# Altium PCB NBP-28 Rev 1.00.PCBDOC (part 4 of 6)
Units mil, origin at the board's own origin, x right, y up, seen from the top; angles counter-clockwise.
Board outline 2716.54 x 3917.15 mil, 8 copper layers (Top Layer, MidLayer3, MidLayer1, VCC, Gnd, VCCINT, MidLayer2, Bottom Layer), stack 59.043 mil thick; 229 components, 429 nets, 1584 pads, 1020 vias.
Unrouted connection lines stored in the file: 302.
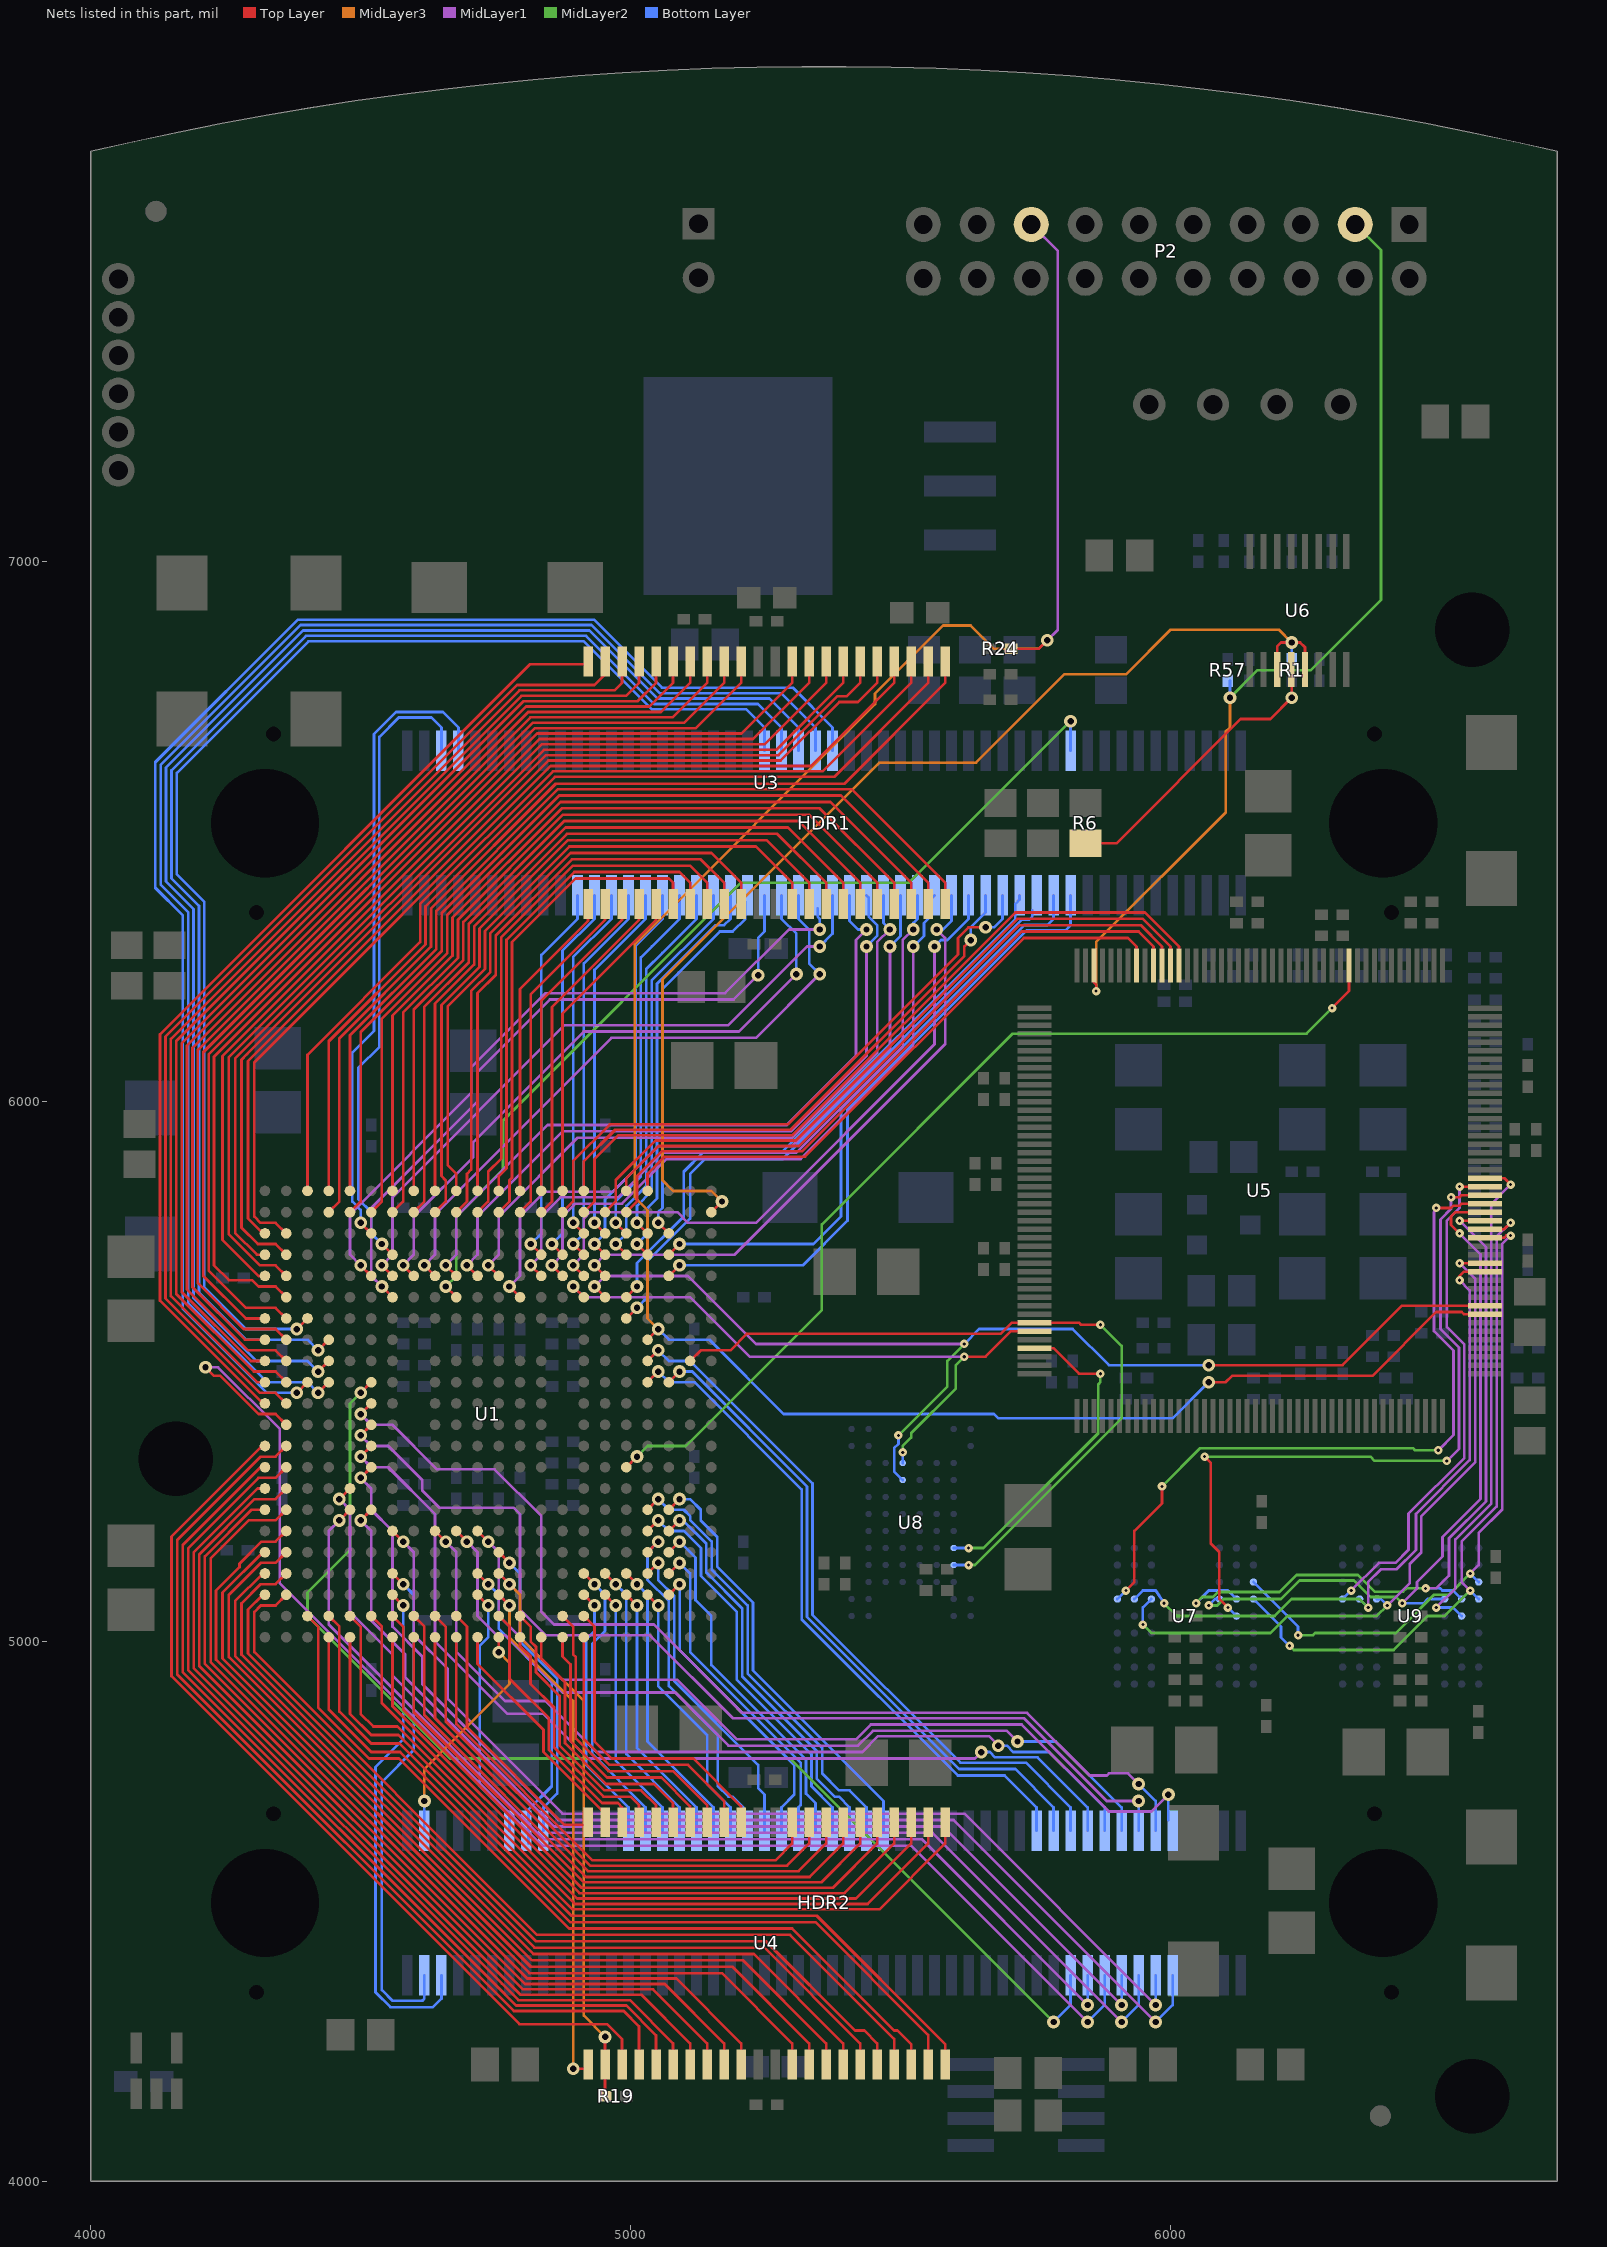
[diagram p10: the nets of this part, all layers, seen from the top]

## Via types
v1: diameter 23.62, hole 11.81, Top Layer to Bottom Layer, 614 vias
v2: diameter 15.75, hole 5.91, Top Layer to Bottom Layer, 214 vias
v3: diameter 78.74, hole 47.24, Top Layer to Bottom Layer, 101 vias
v4: diameter 35.43, hole 19.68, Top Layer to Bottom Layer, 59 vias
v5: diameter 19.68, hole 7.87, Top Layer to Bottom Layer, 32 vias

## Nets (pads, with @x,y where several pads share a name; then routed paths per layer and width w, separated by ;. In a path a pad name is that pad's centre, name@x,y a point inside that pad or via, vN(x,y) a via of type N, cw(c..) or ccw(c..) an arc to the next point about the centre after c; other vN are vias at no path point) (continued)
NEXUS_TMS: HDR1.80 U1.F10 | length 1791.8
  Top Layer w5: v1(4657.48,5657.48) U1.F10@4677.17,5637.8
  MidLayer2 w5: v1(4657.48,5657.48) 4677.17,5677.17 4677.17,5787.4 4763.78,5874.02 4763.78,5964.57 5204.73,6405.51 5515.75,6405.51 v1(5814.96,6704.72)
  Bottom Layer w5: HDR1.80@5814.96,6649.61 v1(5814.96,6704.72)
NFLASH_CS: U5.41 U8.H2 | length 609.3
  Top Layer w5: U5.41@5748.03,5543.31 5783.47,5543.31 5830.71,5496.06 v2(5870.08,5496.06)
  MidLayer2 w5: v2(5625.99,5173.23) 5653.54,5173.23 5866.14,5385.83 5866.14,5476.38 5870.08,5480.32 v2(5870.08,5496.06)
  Bottom Layer w5: U8.H2@5598.43,5173.23 v2(5625.99,5173.23)
NOE: U1.J21 U5.38 U8.J2 | length 1403.9
  Top Layer w5: U1.J21@5110.24,5519.69 5129.92,5539.37 5185.04,5539.37 5215.91,5570.24 5685.86,5570.24 5706.18,5590.55 U5.38@5748.03,5590.55 5830.71,5590.55 5834.65,5586.61 v2(5870.08,5586.61)
  MidLayer2 w5: v2(5625.99,5141.73) 5637.8,5141.73 5909.45,5413.39 5909.45,5547.24 v2(5870.08,5586.61)
  Bottom Layer w5: U8.J2@5598.43,5141.73 v2(5625.99,5141.73)
NRESETIN: P2.15 R24.1 U1.H19 U5.96 | length 4358.4
  Top Layer w5: U1.H19@5031.5,5559.06 v1(5051.18,5578.74) ; R24.1@5704.73,6838.58 5755.91,6838.58 v1(5771.65,6854.33) ; v1(6070.87,5480.32) 6102.36,5480.32 6114.17,5492.13 6374.02,5492.13 6492.13,5610.24 6539.37,5610.24 6543.31,5606.3 U5.96@6582.68,5606.3
  MidLayer1 w5: P2.15@5742.13,7624.8 5791.34,7575.59 5791.34,6874.02 v1(5771.65,6854.33)
  MidLayer3 w5: v1(5051.18,5578.74) 5031.5,5598.43 5031.5,5799.21 5007.88,5822.84 5007.88,6291.34 5452.76,6736.22 5452.76,6755.91 5578.74,6881.89 5629.92,6881.89 5673.23,6838.58 5755.91,6838.58 v1(5771.65,6854.33)
  Bottom Layer w5: v1(5051.18,5578.74) 5070.87,5559.06 5145.67,5559.06 5283.47,5421.26 5673.23,5421.26 5681.1,5413.39 6003.94,5413.39 v1(6070.87,5480.32)
NRESETOUT: U1.F17 U5.97 U8.D5 | length 2134.9
  Top Layer w5: v1(4933.07,5657.48) U1.F17@4952.76,5637.8 ; v1(6070.87,5511.81) 6318.9,5511.81 6429.14,5622.05 U5.97@6582.68,5622.05
  MidLayer1 w5: v1(4933.07,5657.48) 4952.76,5677.17 5106.3,5677.17 5232.28,5551.18 v2(5618.11,5551.18)
  MidLayer2 w5: v2(5496.06,5381.89) 5586.62,5472.44 5586.62,5519.69 v2(5618.11,5551.18)
  Bottom Layer w5: v2(5496.06,5381.89) 5496.06,5366.14 5488.19,5358.27 5488.19,5314.96 U8.D5@5503.94,5299.21 ; v2(5618.11,5551.18) 5645.67,5578.74 5818.9,5578.74 5885.83,5511.81 v1(6070.87,5511.81)
NSDRAM_CAS: U5.108 U7.F7 U9.F7 | length 1367
  Top Layer w5: v2(6535.43,5755.91) 6519.69,5771.65 6519.69,5787.4 6527.56,5795.28 U5.108@6582.68,5795.28
  MidLayer1 w5: v2(6429.14,5070.87) 6456.69,5098.43 6456.69,5110.24 6503.94,5157.48 6503.94,5193.64 6574.17,5263.88 6574.17,5717.17 v2(6535.43,5755.91)
  MidLayer2 w5: v2(6070.87,5066.93) 6086.62,5066.93 6098.43,5078.74 6204.73,5078.74 6239.21,5113.23 6339.53,5113.23 6370.4,5082.36 6417.64,5082.36 v2(6429.14,5070.87)
  Bottom Layer w5: v2(6070.87,5066.93) 6082.68,5078.74 U7.F7@6090.55,5078.74 ; v2(6429.14,5070.87) 6468.51,5070.87 6476.38,5078.74 U9.F7@6507.88,5078.74
NSDRAM_CS: U5.105 U7.G9 U9.G9 | length 1227
  Top Layer w5: U5.105@6582.68,5748.03 6618.11,5748.03 6622.05,5751.97 v2(6629.92,5751.97)
  MidLayer1 w5: v2(6555.12,5125.98) 6570.87,5141.73 6570.87,5200.79 6614.17,5244.1 6614.17,5736.22 v2(6629.92,5751.97)
  MidLayer2 w5: v2(6236.22,5011.81) 6263.78,5011.81 6267.72,5015.75 6417.32,5015.75 6488.19,5086.61 6515.75,5086.61 v2(6555.12,5125.98)
  Bottom Layer w5: U7.G9@6153.54,5110.24 6236.22,5027.56 v2(6236.22,5011.81) ; v2(6555.12,5125.98) U9.G9@6570.87,5110.24
NSDRAM_RAS: U5.107 U7.F8 U9.F8 | length 1434.7
  Top Layer w5: v2(6535.43,5779.53) U5.107@6582.68,5779.53
  MidLayer1 w5: v2(6472.44,5098.43) 6492.13,5098.43 6515.75,5122.05 6515.75,5191.31 6584.17,5259.73 6584.17,5730.79 v2(6535.43,5779.53)
  MidLayer2 w5: v2(6047.25,5070.87) 6058.74,5082.36 6078.43,5082.36 6087.8,5091.73 6201.97,5091.73 6233.47,5123.23 6347.19,5123.23 6378.06,5092.36 6430.95,5092.36 6437.01,5098.43 v2(6472.44,5098.43)
  Bottom Layer w5: v2(6047.25,5070.87) 6070.87,5094.49 6106.3,5094.49 U7.F8@6122.05,5078.74 ; v2(6472.44,5098.43) 6499.66,5098.43 6503.59,5094.49 6523.62,5094.49 U9.F8@6539.37,5078.74
NSDRAM_WE: U5.106 U7.F9 U9.F9 | length 1297.4
  Top Layer w5: U5.106@6582.68,5763.78 6618.11,5763.78 v2(6629.92,5775.59)
  MidLayer1 w5: v2(6555.12,5094.49) 6539.37,5110.24 6539.37,5185.04 6604.17,5249.84 6604.17,5749.84 v2(6629.92,5775.59)
  MidLayer2 w5: v2(6220.47,4992.13) 6228.35,4984.25 6413.39,4984.25 6476.38,5047.24 6507.88,5047.24 v2(6555.12,5094.49)
  Bottom Layer w5: U7.F9@6153.54,5078.74 6204.73,5027.56 6204.73,5007.87 v2(6220.47,4992.13) ; v2(6555.12,5094.49) U9.F9@6570.87,5078.74
NTRST: P2.3 R57.1 U5.174 | length 1796.4
  Top Layer w5: U5.174@5858.27,6251.97 5858.27,6220.47 5862.21,6216.54 v2(5862.21,6204.72)
  MidLayer2 w5: v1(6110.24,6748.03) 6161.42,6799.21 6259.84,6799.21 6389.77,6929.13 6389.77,7577.17 P2.3@6342.13,7624.8
  MidLayer3 w5: v2(5862.21,6204.72) 5862.21,6295.28 6102.36,6535.43 6102.36,6685.04 6110.24,6692.91 v1(6110.24,6748.03)
  Bottom Layer w5: v1(6110.24,6748.03) R57.1@6110.24,6779.53
NWAIT: U1.P18 U5.144 | length 1843.9
  Top Layer w5: U1.P18@4992.13,5322.84 v1(5011.81,5342.52) ; v2(6299.21,6173.23) 6330.71,6204.72 U5.144@6330.71,6251.97
  MidLayer2 w5: v1(5011.81,5342.52) 5031.5,5362.21 5102.36,5362.21 5354.33,5614.17 5354.33,5772.53 5707.78,6125.98 6251.97,6125.98 v2(6299.21,6173.23)
NWE: U1.F16 U5.39 U8.C5 | length 1199.7
  Top Layer w5: v1(4893.7,5657.48) U1.F16@4913.39,5637.8 ; v2(5618.11,5527.56) 5657.33,5527.56 5704.57,5574.8 U5.39@5748.03,5574.8
  MidLayer1 w5: v1(4893.7,5657.48) 4913.39,5637.8 5110.24,5637.8 5220.47,5527.56 v2(5618.11,5527.56)
  MidLayer2 w5: v2(5503.94,5350.39) 5503.94,5362.21 5519.69,5377.95 5519.69,5385.83 5602.36,5468.5 5602.36,5511.81 v2(5618.11,5527.56)
  Bottom Layer w5: U8.C5@5503.94,5330.71 v2(5503.94,5350.39)
PROCESSOR_TDI: R1.2 U1.B22 U6.3 U6.5 | length 2143.6
  Top Layer w5: U1.B22@5149.61,5795.28 v1(5169.29,5814.96) ; U6.3@6197.84,6800.2 6197.84,6843.5 6204.73,6850.39 v1(6224.41,6850.39) 6240.16,6850.39 6249.02,6841.54 U6.5@6249.02,6800.2
  MidLayer3 w5: v1(5169.29,5814.96) 5149.61,5834.65 5078.74,5834.65 5059.06,5854.33 5059.06,6226.22 5460.63,6627.8 5639.61,6627.8 5803.15,6791.34 5917.32,6791.34 6000,6874.02 6200.79,6874.02 v1(6224.41,6850.39)
  Bottom Layer w5: R1.2@6224.41,6818.9 v1(6224.41,6850.39)
PROCESSOR_TDO: R6.1 U6.4 | length 544.8
  Top Layer w5: R6.1@5842.52,6478.35 5899.61,6478.35 6129.92,6708.66 6185.04,6708.66 v1(6224.41,6748.03) U6.4@6224.41,6799.21
RAM0_DATA0: HDR2.42 U1.V19 | length 649.4
  Top Layer w5: U1.V19@5031.5,5165.35 v1(5051.18,5185.04)
  Bottom Layer w5: v1(5051.18,5185.04) 5031.5,5165.35 5031.5,5114.17 5070.87,5074.8 5070.87,4917.32 5161.42,4826.77 5161.42,4732.28 5181.1,4712.6 5188.98,4712.6 5208.66,4692.91 HDR2.42@5208.66,4649.61
RAM0_DATA1: HDR2.40 U1.Y19 | length 500.6
  Top Layer w5: U1.Y19@5031.5,5086.61 v1(5051.18,5066.93)
  Bottom Layer w5: v1(5051.18,5066.93) 5051.18,4917.32 5141.73,4826.77 5141.73,4736.22 5185.04,4692.91 HDR2.40@5185.04,4649.61
RAM0_DATA2: HDR2.38 U1.W18 | length 543.2
  Top Layer w5: U1.W18@4992.13,5125.98 v1(5011.81,5106.3)
  Bottom Layer w5: v1(5011.81,5106.3) 5031.5,5086.61 5031.5,4814.96 5153.55,4692.91 HDR2.38@5153.55,4649.61
RAM0_DATA3: HDR2.36 U1.Y18 | length 490.8
  Top Layer w5: U1.Y18@4992.13,5086.61 v1(5011.81,5066.93)
  Bottom Layer w5: v1(5011.81,5066.93) 5011.81,4803.15 5122.05,4692.91 HDR2.36@5122.05,4649.61
RAM0_DATA4: HDR2.34 U1.W17 | length 533.5
  Top Layer w5: U1.W17@4952.76,5125.98 v1(4972.44,5106.3)
  Bottom Layer w5: v1(4972.44,5106.3) 4992.13,5086.61 4992.13,4791.34 5090.55,4692.91 HDR2.34@5090.55,4649.61
RAM0_DATA5: HDR2.32 U1.Y17 | length 481
  Top Layer w5: U1.Y17@4952.76,5086.61 v1(4972.44,5066.93)
  Bottom Layer w5: v1(4972.44,5066.93) 4972.44,4779.53 5059.06,4692.91 HDR2.32@5059.06,4649.61
RAM0_DATA6: HDR2.30 U1.W16 | length 543.2
  Top Layer w5: U1.W16@4913.39,5125.98 v1(4933.07,5106.3)
  Bottom Layer w5: v1(4933.07,5106.3) 4952.76,5086.61 4952.76,5019.69 4929.14,4996.06 4929.14,4791.34 5027.56,4692.91 HDR2.30@5027.56,4649.61
RAM0_DATA7: HDR2.28 U1.Y16 | length 484.3
  Top Layer w5: U1.Y16@4913.39,5086.61 v1(4933.07,5066.93)
  Bottom Layer w5: v1(4933.07,5066.93) 4933.07,5019.69 4917.32,5003.94 4917.32,4771.66 4996.07,4692.91 HDR2.28@4996.06,4649.61
RAM0_OE: HDR1.41 U1.C20 | length 703
  Top Layer w5: v1(5051.18,5775.59) U1.C20@5070.87,5755.91
  Bottom Layer w5: v1(5051.18,5775.59) 5051.18,5795.28 5059.06,5803.15 5059.06,6208.66 5165.36,6314.96 5188.98,6314.96 5212.6,6338.58 HDR1.41@5212.6,6370.08
RAM0_WE: HDR1.79 U1.E20 | length 1188.8
  Top Layer w5: U1.E20@5070.87,5677.17 v1(5090.55,5696.85)
  Bottom Layer w5: v1(5090.55,5696.85) 5318.9,5696.85 5401.58,5779.53 5401.58,5985.13 5733.43,6316.99 5805.28,6316.99 5814.96,6326.67 HDR1.79@5814.96,6381.89
RAM1_DATA0: HDR1.45 U1.E8 | length 1194.3
  Top Layer w5: v1(4578.74,5696.85) U1.E8@4598.43,5677.17
  MidLayer1 w5: v1(4578.74,5696.85) 4598.43,5716.54 4598.43,5787.4 4708.66,5897.64 4708.66,5925.2 4913.39,6129.92 5200.79,6129.92 v1(5307.09,6236.22)
  Bottom Layer w5: HDR1.45@5279.53,6381.89 5279.53,6338.58 5307.09,6311.02 v1(5307.09,6236.22)
RAM1_DATA1: HDR1.49 U1.E6 | length 1287.8
  Top Layer w5: v1(4500,5696.85) U1.E6@4519.69,5677.17
  MidLayer1 w5: v1(4500,5696.85) 4480.32,5716.54 4480.32,5791.34 4704.73,6015.75 4704.73,6062.99 4842.52,6200.79 5175.2,6200.79 5293.31,6318.9 v1(5350.4,6318.9)
  Bottom Layer w5: HDR1.49@5346.46,6358.27 5346.46,6342.52 5350.4,6338.58 v1(5350.4,6318.9)
RAM1_DATA2: HDR1.53 U1.E10 | length 1317.3
  Top Layer w5: v1(4657.48,5696.85) U1.E10@4677.17,5677.17
  MidLayer1 w5: v1(4657.48,5696.85) 4677.17,5716.54 4677.17,5787.4 4846.46,5956.69 5289.01,5956.69 5417.32,6085.01 5417.32,6299.21 v1(5437.01,6318.9)
  Bottom Layer w5: HDR1.53@5405.51,6381.89 5405.51,6334.65 5421.26,6318.9 v1(5437.01,6318.9)
RAM1_DATA3: HDR1.57 U1.E12 | length 1258.9
  Top Layer w5: v1(4736.22,5696.85) U1.E12@4755.91,5677.17
  MidLayer1 w5: v1(4736.22,5696.85) 4755.91,5716.54 4755.91,5787.4 4901.58,5933.07 5299.21,5933.07 5456.69,6090.55 5456.69,6295.28 v1(5480.32,6318.9)
  Bottom Layer w5: HDR1.57@5468.5,6381.89 5468.5,6330.71 v1(5480.32,6318.9)
RAM1_DATA4: HDR1.55 U1.E11 | length 1283.5
  Top Layer w5: v1(4696.85,5696.85) U1.E11@4716.54,5677.17
  MidLayer1 w5: v1(4696.85,5696.85) 4716.54,5716.54 4716.54,5787.4 4874.02,5944.88 5296.88,5944.88 5437.01,6085.01 v1(5437.01,6287.4)
  Bottom Layer w5: v1(5437.01,6287.4) 5456.69,6307.09 5456.69,6326.77 5440.95,6342.52 5440.95,6377.95 HDR1.55@5437.01,6381.89
RAM1_DATA5: HDR1.51 U1.E7 | length 1250
  Top Layer w5: v1(4539.37,5696.85) U1.E7@4559.06,5677.17
  MidLayer1 w5: v1(4539.37,5696.85) 4559.06,5716.54 4559.06,5822.84 4877.95,6141.73 5181.1,6141.73 5326.77,6287.4 v1(5350.4,6287.4)
  Bottom Layer w5: v1(5350.4,6287.4) 5374.02,6311.02 HDR1.51@5374.02,6381.89
RAM1_DATA6: HDR1.47 U1.E9 | length 1189.3
  Top Layer w5: v1(4618.11,5696.85) U1.E9@4637.8,5677.17
  MidLayer1 w5: v1(4618.11,5696.85) 4637.8,5716.54 4637.8,5791.34 4964.57,6118.11 5232.28,6118.11 v1(5350.4,6236.22)
  Bottom Layer w5: HDR1.47@5311.02,6381.89 5311.02,6338.58 5330.71,6318.9 5330.71,6255.91 v1(5350.4,6236.22)
RAM1_DATA7: HDR1.43 U1.F7 | length 1261.6
  Top Layer w5: v1(4539.37,5657.48) U1.F7@4559.06,5637.8
  MidLayer1 w5: v1(4539.37,5657.48) 4519.69,5677.17 4519.69,5803.15 4716.54,6000 4716.54,6055.12 4850.4,6188.98 5190.95,6188.98 v1(5236.22,6234.25)
  Bottom Layer w5: v1(5236.22,6234.25) 5236.22,6303.15 5248.03,6314.96 HDR1.43@5248.03,6381.89
RAM1_OE: HDR1.39 U1.D19 | length 754.5
  Top Layer w5: v1(5011.81,5736.22) U1.D19@5031.5,5716.54
  Bottom Layer w5: v1(5011.81,5736.22) 5031.5,5755.91 5031.5,5803.15 5049.06,5820.71 5049.06,6218.35 5157.48,6326.77 5173.23,6326.77 5185.04,6338.58 HDR1.39@5185.04,6381.89
RAM1_WE: HDR1.61 U1.E14 | length 1217.2
  Top Layer w5: v1(4814.96,5696.85) U1.E14@4834.65,5677.17
  MidLayer1 w5: v1(4814.96,5696.85) 4834.65,5716.54 4834.65,5787.4 4870.08,5822.84 4976.38,5822.84 5059.06,5905.51 5307.09,5905.51 5503.94,6102.36 5503.94,6299.21 v1(5523.62,6318.9)
  Bottom Layer w5: v1(5523.62,6318.9) 5523.62,6330.71 5531.5,6338.58 HDR1.61@5531.5,6381.89
RAM_ADDR0: HDR1.21 U1.D14 | length 709.4
  Top Layer w5: v1(4814.96,5736.22) U1.D14@4834.65,5716.54
  Bottom Layer w5: v1(4814.96,5736.22) 4834.65,5755.91 4834.65,6271.66 4901.57,6338.58 HDR1.21@4901.57,6381.89
RAM_ADDR1: HDR1.25 U1.C16 | length 663.5
  Top Layer w5: v1(4893.7,5775.59) U1.C16@4913.39,5755.91
  Bottom Layer w5: v1(4893.7,5775.59) 4893.7,6267.72 4964.57,6338.58 HDR1.25@4964.57,6381.89
RAM_ADDR2: HDR1.29 U1.C17 | length 673.3
  Top Layer w5: v1(4933.07,5775.59) U1.C17@4952.76,5755.91
  Bottom Layer w5: v1(4933.07,5775.59) 4933.07,6244.1 5027.56,6338.58 HDR1.29@5027.56,6381.89
RAM_ADDR3: HDR1.33 U1.C18 | length 683.1
  Top Layer w5: v1(4972.44,5775.59) U1.C18@4992.13,5755.91
  Bottom Layer w5: v1(4972.44,5775.59) 4972.44,5814.96 5019.06,5861.58 5019.06,6267.09 5039.53,6287.57 5090.55,6338.58 HDR1.33@5090.55,6381.89
RAM_ADDR4: HDR1.65 U1.E17 | length 1147.5
  Top Layer w5: v1(4933.07,5696.85) U1.E17@4952.76,5677.17
  MidLayer1 w5: v1(4933.07,5696.85) 4952.76,5716.54 5192.91,5716.54 5582.68,6106.3 5582.68,6303.15 v1(5566.93,6318.9)
  Bottom Layer w5: v1(5566.93,6318.9) 5578.74,6318.9 5594.49,6334.64 HDR1.65@5594.49,6381.89
RAM_ADDR5: HDR1.69 U1.A16 | length 1045.5
  Top Layer w5: U1.A16@4913.39,5834.65 4913.39,5889.76 4971.58,5947.95 5296.02,5947.95 5618.11,6270.05 5618.11,6287.4 v1(5629.92,6299.21)
  Bottom Layer w5: v1(5629.92,6299.21) 5629.92,6322.84 5657.48,6350.39 HDR1.69@5657.48,6381.89
RAM_ADDR6: HDR1.73 U1.F18 | length 1131.1
  Top Layer w5: U1.F18@4992.13,5637.8 v1(5011.81,5657.48)
  Bottom Layer w5: v1(5011.81,5657.48) 5011.81,5700.79 5098.43,5787.4 5098.43,5870.08 5133.86,5905.51 5279.53,5905.51 5712.6,6338.58 5712.6,6366.14 5720.47,6374.02 HDR1.73@5720.47,6381.89
RAM_ADDR7: HDR1.77 U1.D20 | length 1130.8
  Top Layer w5: U1.D20@5070.87,5716.54 v1(5090.55,5736.22)
  Bottom Layer w5: v1(5090.55,5736.22) 5338.58,5736.22 5389.77,5787.4 5389.77,5987.46 5729.29,6326.99 5771.87,6326.99 5783.47,6338.58 HDR1.77@5783.47,6381.89
RAM_ADDR8: HDR1.75 U1.G18 | length 1159.6
  Top Layer w5: U1.G18@4992.13,5598.43 v1(5011.81,5618.11)
  Bottom Layer w5: v1(5011.81,5618.11) 5031.5,5637.8 5031.5,5704.72 5110.24,5783.47 5110.24,5866.14 5137.8,5893.7 5281.86,5893.7 5725.15,6336.99 5738.56,6336.99 5744.1,6342.52 HDR1.75@5744.1,6354.33
RAM_ADDR9: HDR1.71 U1.B15 | length 1145.2
  Top Layer w5: U1.B15@4874.02,5795.28 4893.7,5814.96 4893.7,5889.76 4961.89,5957.95 5291.87,5957.95 5606.3,6272.38 5606.3,6303.15 5625.99,6322.84 v1(5657.48,6322.84)
  Bottom Layer w5: v1(5657.48,6322.84) 5673.23,6322.84 5688.98,6338.58 HDR1.71@5688.98,6381.89
RAM_ADDR10: HDR1.67 U1.E16 | length 1230.8
  Top Layer w5: v1(4893.7,5696.85) U1.E16@4913.39,5677.17
  MidLayer1 w5: v1(4893.7,5696.85) 4913.39,5716.54 4913.39,5783.47 4925.2,5795.28 5086.62,5795.28 5106.3,5775.59 5232.28,5775.59 5562.99,6106.3 v1(5562.99,6287.4)
  Bottom Layer w5: v1(5562.99,6287.4) 5574.8,6299.21 5586.62,6299.21 5625.98,6338.58 HDR1.67@5625.98,6381.89
RAM_ADDR11: HDR1.63 U1.E15 | length 1202.4
  Top Layer w5: v1(4854.33,5696.85) U1.E15@4874.02,5677.17
  MidLayer1 w5: v1(4854.33,5696.85) 4874.02,5716.54 4874.02,5787.4 4897.64,5811.02 4984.25,5811.02 5066.93,5893.7 5314.96,5893.7 5523.62,6102.36 v1(5523.62,6287.4)
  Bottom Layer w5: v1(5523.62,6287.4) 5543.31,6307.09 5543.31,6330.71 5555.12,6342.52 5555.12,6374.02 HDR1.63@5562.99,6381.89
RAM_ADDR12: HDR1.59 U1.F13 | length 1271.4
  Top Layer w5: v1(4775.59,5657.48) U1.F13@4795.28,5637.8
  MidLayer1 w5: v1(4775.59,5657.48) 4795.28,5677.17 4795.28,5787.4 4840.71,5832.84 4966.69,5832.84 5051.18,5917.32 5299.21,5917.32 5480.32,6098.43 v1(5480.32,6287.4)
  Bottom Layer w5: v1(5480.32,6287.4) 5500,6307.09 HDR1.59@5500,6381.89
RAM_ADDR13: HDR1.35 U1.D18 | length 735.5
  Top Layer w5: v1(4972.44,5736.22) U1.D18@4992.13,5716.54
  Bottom Layer w5: v1(4972.44,5736.22) 4992.13,5755.91 4992.13,5807.09 5029.06,5844.02 5029.06,6245.59 5058.95,6275.49 5122.05,6338.58 HDR1.35@5122.05,6381.89
RAM_ADDR14: HDR1.31 U1.D17 | length 725.7
  Top Layer w5: v1(4933.07,5736.22) U1.D17@4952.76,5716.54
  Bottom Layer w5: v1(4933.07,5736.22) 4952.76,5755.91 4952.76,5818.9 5009.06,5875.2 5009.06,6288.58 5059.05,6338.58 HDR1.31@5059.05,6381.89
RAM_ADDR15: HDR1.27 U1.D16 | length 715.9
  Top Layer w5: v1(4893.7,5736.22) U1.D16@4913.39,5716.54
  Bottom Layer w5: v1(4893.7,5736.22) 4913.39,5755.91 4913.39,6255.91 4996.06,6338.58 HDR1.27@4996.06,6381.89
RAM_ADDR16: HDR1.23 U1.D15 | length 706.1
  Top Layer w5: v1(4854.33,5736.22) U1.D15@4874.02,5716.54
  Bottom Layer w5: v1(4854.33,5736.22) 4874.02,5755.91 4874.02,6279.53 4933.07,6338.58 HDR1.23@4933.07,6381.89
RAM_CS: HDR1.37 U1.C19 | length 692.8
  Top Layer w5: v1(5011.81,5775.59) U1.C19@5031.5,5755.91
  Bottom Layer w5: v1(5011.81,5775.59) 5011.81,5807.09 5039.06,5834.33 5039.06,6224.09 5153.54,6338.58 HDR1.37@5153.54,6381.89
RED0: HDR1.6 U1.D7 | length 1182.1
  Top Layer w5: v1(4539.37,5736.22) U1.D7@4559.06,5716.54
  Bottom Layer w5: v1(4539.37,5736.22) 4519.69,5755.91 4519.69,5795.28 4496.06,5818.9 4496.06,6062.99 4534.62,6101.54 4534.62,6675.61 4570.62,6711.61 4630.91,6711.61 4649.61,6692.91 HDR1.6@4649.61,6649.61
RED1: HDR1.8 U1.C6 | length 1184.5
  Top Layer w5: v1(4500,5775.59) U1.C6@4519.69,5755.91
  Bottom Layer w5: v1(4500,5775.59) 4500,5799.21 4484.57,5814.65 4484.57,6090.87 4524.62,6130.91 4524.62,6680.61 4565.62,6721.61 4652.41,6721.61 4681.1,6692.91 HDR1.8@4681.1,6649.61
REF_CLK: HDR2.4 U1.AB12 | length 437.2
  Top Layer w5: U1.AB12@4751.97,5003.94 U1.AB12@4755.91,5007.87 v1(4755.91,4980.32)
  MidLayer3 w5: v1(4618.11,4704.72) 4618.11,4763.78 4775.59,4921.26 4775.59,4960.63 v1(4755.91,4980.32)
  Bottom Layer w5: HDR2.4@4618.11,4649.61 v1(4618.11,4704.72)
SCL: HDR2.5 U1.Y7 | length 948.9
  Top Layer w5: U1.Y7@4559.06,5086.61 v1(4578.74,5066.93)
  Bottom Layer w5: v1(4578.74,5066.93) 4578.74,4818.9 4527.56,4767.72 4527.56,4350.39 4555.12,4322.84 4633.86,4322.84 4649.61,4338.58 HDR2.5@4649.61,4381.89
SDA: HDR2.3 U1.W7 | length 944.3
  Top Layer w5: U1.W7@4559.06,5125.98 v1(4578.74,5106.3)
  Bottom Layer w5: v1(4578.74,5106.3) 4598.43,5086.61 4598.43,4799.21 4539.37,4740.16 4539.37,4354.33 4559.06,4334.65 4614.17,4334.65 4618.11,4338.58 HDR2.3@4618.11,4381.89
SDRAM_CKE: U5.102 U7.F3 U9.F3 | length 1319.2
  Top Layer w5: v2(6535.43,5700.79) U5.102@6582.68,5700.79
  MidLayer1 w5: v2(6401.58,5066.93) 6443.26,5108.61 6443.26,5144.05 6464.57,5165.35 6464.57,5232.28 6564.17,5331.89 6564.17,5672.05 v2(6535.43,5700.79)
  MidLayer2 w5: v2(5948.82,5031.5) 5964.57,5015.75 6185.04,5015.75 6216.54,5047.24 6381.89,5047.24 v2(6401.58,5066.93)
  Bottom Layer w5: v2(5948.82,5031.5) 5948.82,5062.99 U7.F3@5964.57,5078.74 ; U9.F3@6381.89,5078.74 6389.77,5078.74 v2(6401.58,5066.93)
SDRAM_CLK: U5.101 U7.F2 U9.F2 | length 1271.3
  Top Layer w5: v2(6535.43,5669.29) 6535.43,5677.17 6543.31,5685.04 U5.101@6582.68,5685.04
  MidLayer1 w5: v2(6366.14,5062.99) 6366.14,5110.24 6389.77,5133.86 6418.93,5133.86 6454.57,5169.5 6454.57,5236.43 6554.17,5336.03 6554.17,5650.55 v2(6535.43,5669.29)
  MidLayer2 w5: v2(5988.19,5070.87) 6011.81,5047.24 6192.91,5047.24 6224.41,5078.74 6350.4,5078.74 v2(6366.14,5062.99)
  Bottom Layer w5: U7.F2@5933.07,5078.74 5948.82,5094.49 5972.44,5094.49 v2(5988.19,5070.87) ; U9.F2@6350.4,5078.74 v2(6366.14,5062.99)
SDRAM_DQM0: U5.112 U9.E8 | length 946.4
  Top Layer w5: U5.112@6582.68,5858.27 6618.11,5858.27 v2(6629.92,5846.46)
  MidLayer1 w5: v2(6492.13,5062.99) 6527.56,5098.43 6527.56,5188.98 6594.17,5255.59 6594.17,5810.71 v2(6629.92,5846.46)
  Bottom Layer w5: v2(6492.13,5062.99) 6523.62,5062.99 U9.E8@6539.37,5047.24
SDRAM_DQM1: U5.111 U9.F1 | length 945.5
  Top Layer w5: v2(6535.43,5842.52) U5.111@6582.68,5842.52
  MidLayer1 w5: v2(6334.65,5094.49) 6385.83,5145.67 6416.6,5145.67 6440.95,5170.02 6440.95,5236.95 6544.17,5340.17 6544.17,5550.32 6511.81,5582.68 6511.81,5779.53 6535.43,5803.15 v2(6535.43,5842.52)
  Bottom Layer w5: U9.F1@6318.9,5078.74 v2(6334.65,5094.49)
SDRAM_DQM2: U5.110 U7.E8 | length 1356.2
  Top Layer w5: v2(6062.99,5342.52) 6074.8,5330.71 6074.8,5181.1 6090.55,5165.35 6090.55,5078.74 v2(6106.3,5062.99) ; v2(6519.69,5822.84) 6535.43,5822.84 6539.37,5826.77 U5.110@6582.68,5826.77
  MidLayer1 w5: v2(6511.81,5334.65) 6534.17,5357.01 6534.17,5544.57 6500,5578.74 6500,5781.86 6519.69,5801.54 v2(6519.69,5822.84)
  MidLayer2 w5: v2(6062.99,5342.52) 6370.08,5342.52 6377.95,5334.65 v2(6511.81,5334.65)
  Bottom Layer w5: v2(6106.3,5062.99) U7.E8@6122.05,5047.24
SDRAM_DQM3: U5.109 U7.F1 | length 1355.8
  Top Layer w5: v2(5917.32,5094.49) 5933.07,5110.24 5933.07,5204.72 5984.25,5255.91 v2(5984.25,5287.4) ; v2(6492.13,5803.15) 6519.69,5803.15 6523.62,5807.09 6535.43,5807.09 6539.37,5811.02 U5.109@6582.68,5811.02
  MidLayer1 w5: v2(6492.13,5803.15) 6488.19,5795.28 6488.19,5574.8 6524.17,5538.82 6524.17,5382.44 v2(6496.06,5354.33)
  MidLayer2 w5: v2(5984.25,5287.4) 6055.12,5358.27 6448.82,5358.27 6452.76,5354.33 v2(6496.06,5354.33)
  Bottom Layer w5: U7.F1@5901.58,5078.74 v2(5917.32,5094.49)
SP0: HDR2.79 U1.K6 | length 2275
  Top Layer w5: v1(4500,5460.63) U1.K6@4519.69,5480.32
  MidLayer2 w5: v1(4500,5460.63) 4480.32,5440.95 4480.32,5169.29 4401.58,5090.55 4401.58,5047.24 4665.36,4783.47 5295.28,4783.47 v1(5783.47,4295.28)
  Bottom Layer w5: v1(5783.47,4295.28) 5814.96,4326.77 HDR2.79@5814.96,4381.89
SP1: HDR2.81 U1.T5 | length 1981.4
  Top Layer w5: v1(4460.63,5224.41) U1.T5@4480.32,5244.09
  MidLayer1 w5: v1(4460.63,5224.41) 4440.95,5204.72 4440.95,5031.5 4838.58,4633.86 5539.37,4633.86 v1(5846.46,4326.77)
  Bottom Layer w5: v1(5846.46,4326.77) HDR2.81@5846.46,4381.89
SP2: HDR2.83 U1.M2 | length 2596.8
  Top Layer w5: v1(4212.6,5507.87) 4228.35,5492.13 4240.16,5492.13 4311.03,5421.26 4342.52,5421.26 U1.M2@4362.21,5401.58
  MidLayer1 w5: v1(4212.6,5507.87) 4236.22,5507.87 4350.4,5393.7 4350.4,5107.91 4836.25,4622.05 5519.69,4622.05 v1(5846.46,4295.28)
  Bottom Layer w5: v1(5846.46,4295.28) 5877.96,4326.77 HDR2.83@5877.96,4381.89
SP3: HDR2.85 U1.T6 | length 1986.4
  Top Layer w5: v1(4500,5224.41) U1.T6@4519.69,5244.09
  MidLayer1 w5: v1(4500,5224.41) 4519.69,5204.72 4519.69,5039.37 4582.68,4976.38 4582.68,4933.07 4858.27,4657.48 5578.74,4657.48 v1(5909.45,4326.77)
  Bottom Layer w5: v1(5909.45,4326.77) HDR2.85@5909.45,4381.89
SP4: HDR2.87 U1.R5 | length 2111.2
  Top Layer w5: v1(4460.63,5263.78) U1.R5@4480.32,5283.47
  MidLayer1 w5: v1(4460.63,5263.78) 4480.32,5244.09 4480.32,5055.12 4559.06,4976.38 4559.06,4937.01 4850.4,4645.67 5559.06,4645.67 v1(5909.45,4295.28)
  Bottom Layer w5: v1(5909.45,4295.28) 5940.95,4326.77 HDR2.87@5940.95,4381.89
SP5: HDR2.89 U1.U7 | length 1954.4
  Top Layer w5: U1.U7@4559.06,5204.72 v1(4578.74,5185.04)
  MidLayer1 w5: v1(4578.74,5185.04) 4598.43,5165.35 4598.43,5011.81 4661.42,4948.82 4661.42,4893.7 4874.02,4681.1 5618.11,4681.1 v1(5972.44,4326.77)
  Bottom Layer w5: v1(5972.44,4326.77) HDR2.89@5972.44,4381.89
SP6: HDR2.91 U1.P6 | length 2174.2
  Top Layer w5: v1(4500,5303.15) U1.P6@4519.69,5322.84
  MidLayer1 w5: v1(4500,5303.15) 4519.69,5283.47 4519.69,5244.1 4559.06,5204.73 4559.06,5027.56 4614.17,4972.44 4614.17,4921.26 4866.14,4669.29 5598.43,4669.29 v1(5972.44,4295.28)
  Bottom Layer w5: v1(5972.44,4295.28) 6003.94,4326.77 HDR2.91@6003.94,4381.89
SP7: HDR2.90 U1.L6 | length 1959.2
  Top Layer w5: v1(4500,5421.26) U1.L6@4519.69,5440.95
  MidLayer1 w5: v1(4500,5421.26) 4519.69,5401.58 4559.06,5401.58 4641.73,5318.9 4748.03,5318.9 4834.65,5232.28 4834.65,5055.12 4858.27,5031.5 5043.31,5031.5 5206.85,4867.95 5734.41,4867.95 5850.4,4751.97 5881.89,4751.97 5885.83,4755.91 5921.26,4755.91 v1(5940.95,4736.22)
  Bottom Layer w5: v1(5940.95,4736.22) 5972.44,4704.72 HDR2.90@5972.44,4649.61
SP8: HDR2.92 U1.U11 | length 1647.1
  Top Layer w5: U1.U11@4716.54,5204.72 v1(4736.22,5185.04)
  MidLayer1 w5: v1(4736.22,5185.04) 4755.91,5165.35 4755.91,5059.06 4755.91,5047.24 4874.02,4929.13 5086.62,4929.13 5196.85,4818.9 5417.32,4818.9 5444.88,4846.46 5724.41,4846.46 5885.83,4685.04 5964.57,4685.04 v1(5996.06,4716.54)
  Bottom Layer w5: HDR2.92@5996.06,4669.29 v1(5996.06,4716.54)
SP9: HDR2.88 U1.M6 | length 1919.7
  Top Layer w5: v1(4500,5381.89) U1.M6@4519.69,5401.58
  MidLayer1 w5: v1(4500,5381.89) 4519.69,5362.21 4551.18,5362.21 4614.17,5299.21 4614.17,5279.53 4645.67,5248.03 4783.47,5248.03 4795.28,5236.22 4795.28,5059.06 4842.52,5011.81 5035.43,5011.81 5189.29,4857.95 5728.66,4857.95 5881.89,4704.72 v1(5940.95,4704.72)
  Bottom Layer w5: HDR2.88@5940.95,4649.61 v1(5940.95,4704.72)
SP10: HDR2.86 U1.U10 | length 1579.6
  Top Layer w5: U1.U10@4677.17,5204.72 v1(4696.85,5185.04)
  MidLayer1 w5: v1(4696.85,5185.04) 4716.54,5165.35 4716.54,5047.24 4751.97,5011.81 4767.72,5011.81 4874.02,4905.51 5082.68,4905.51 5181.1,4807.09 5421.26,4807.09 5448.82,4834.65 5696.85,4834.65 v1(5716.54,4814.96)
  Bottom Layer w5: v1(5716.54,4814.96) 5787.4,4814.96 5909.45,4692.91 HDR2.86@5909.45,4649.61
SP11: HDR2.84 U1.U9 | length 1628.2
  Top Layer w5: U1.U9@4637.8,5204.72 v1(4657.48,5185.04)
  MidLayer1 w5: v1(4657.48,5185.04) 4677.17,5165.35 4677.17,4980.32 4767.72,4889.76 4842.52,4889.76 4937.01,4795.28 5429.14,4795.28 5458.51,4824.65 5663.54,4824.65 v1(5681.1,4807.09)
  Bottom Layer w5: v1(5681.1,4807.09) 5696.85,4807.09 5708.35,4795.59 5775.28,4795.59 5877.96,4692.91 HDR2.84@5877.96,4649.61
SP12: HDR2.82 U1.N6 | length 1834.8
  Top Layer w5: v1(4500,5342.52) U1.N6@4519.69,5362.21
  MidLayer1 w5: v1(4500,5342.52) 4519.69,5322.84 4551.18,5322.84 4637.8,5236.22 4637.8,5000 4771.65,4866.14 4838.58,4866.14 4921.26,4783.47 5637.8,4783.47 v1(5649.61,4795.28)
  Bottom Layer w5: v1(5649.61,4795.28) 5665.36,4795.28 5675.04,4785.59 5753.78,4785.59 5846.46,4692.91 HDR2.82@5846.46,4649.61
SP13: HDR2.80 U1.J19 | length 1328.2
  Top Layer w5: U1.J19@5031.5,5519.69 v1(5051.18,5539.37)
  Bottom Layer w5: v1(5051.18,5539.37) 5070.87,5519.69 5110.24,5519.69 5336.85,5293.07 5336.85,5049.55 5610.81,4775.59 5732.29,4775.59 5814.96,4692.91 HDR2.80@5814.96,4649.61
SP14: HDR2.78 U1.K20 | length 1240.1
  Top Layer w5: U1.K20@5070.87,5480.32 v1(5090.55,5500)
  Bottom Layer w5: v1(5090.55,5500) 5114.17,5500 5326.85,5287.32 5326.85,5045.41 5608.48,4763.78 5712.6,4763.78 5783.47,4692.91 HDR2.78@5783.47,4649.61
SP15: HDR2.76 U1.K19 | length 1247
  Top Layer w5: U1.K19@5031.5,5480.32 v1(5051.18,5500)
  Bottom Layer w5: v1(5051.18,5500) 5070.87,5480.32 5118.11,5480.32 5316.85,5281.58 5316.85,5041.26 5606.15,4751.97 5692.92,4751.97 5751.97,4692.91 HDR2.76@5751.97,4649.61
SPI_CLK: HDR1.46 U1.H4 | length 2628.1
  Top Layer w5: v1(4421.26,5539.37) U1.H4@4440.95,5559.06
  Bottom Layer w5: v1(4421.26,5539.37) 4401.58,5559.06 4287.4,5559.06 4200.47,5645.98 4200.47,6362.52 4149.62,6413.38 4149.62,6613.61 4398.62,6862.61 4917.65,6862.61 5043.65,6736.61 5235.83,6736.61 5279.53,6692.91 HDR1.46@5279.53,6649.61
SPI_DIN: HDR1.44 U1.G3 | length 2504.1
  Top Layer w5: v1(4381.89,5578.74) U1.G3@4401.58,5598.43
  Bottom Layer w5: v1(4381.89,5578.74) 4287.4,5578.74 4210.47,5655.67 4210.47,6370.08 4159.62,6420.94 4159.62,6608.61 4403.62,6852.61 4913.51,6852.61 5039.51,6726.61 5214.34,6726.61 5248.03,6692.91 HDR1.44@5248.03,6649.61
SPI_DOUT: HDR1.50 U1.K4 | length 2797.5
  Top Layer w5: v1(4421.26,5460.63) U1.K4@4440.95,5480.32
  Bottom Layer w5: v1(4421.26,5460.63) 4401.58,5480.32 4326.77,5480.32 4180.47,5626.61 4180.47,6351.02 4129.62,6401.88 4129.62,6623.61 4388.62,6882.61 4927.76,6882.61 5053.76,6756.61 5278.83,6756.61 5342.52,6692.91 HDR1.50@5342.52,6649.61
SPI_MODE: HDR1.52 U1.K3 | length 2826.5
  Top Layer w5: v1(4381.89,5460.63) U1.K3@4401.58,5480.32
  Bottom Layer w5: v1(4381.89,5460.63) 4326.77,5460.63 4170.47,5616.93 4170.47,6345.28 4119.62,6396.13 4119.62,6628.61 4383.62,6892.61 4931.9,6892.61 5057.9,6766.61 5300.32,6766.61 5374.02,6692.91 HDR1.52@5374.02,6649.61
SPI_SEL: HDR1.48 U1.J4 | length 2712.8
  Top Layer w5: v1(4421.26,5500) U1.J4@4440.95,5519.69
  Bottom Layer w5: v1(4421.26,5500) 4401.58,5519.69 4307.09,5519.69 4190.47,5636.3 4190.47,6356.77 4139.62,6407.63 4139.62,6618.61 4393.62,6872.61 4923.62,6872.61 5049.62,6746.61 5257.33,6746.61 5311.02,6692.91 HDR1.48@5311.02,6649.61
SRAM0_A0: U1.A13 U3.1 | length 588.6
  Top Layer w5: U1.A13@4795.28,5834.65 4795.28,6208.66 4921.26,6334.65 U3.1@4921.26,6366.14 U3.1@4921.26,6371.06
SRAM0_A1: U1.B13 U3.2 | length 641
  Top Layer w5: U1.B13@4795.28,5795.28 4814.96,5814.96 4814.96,6198.82 4952.76,6336.61 U3.2@4952.76,6366.14 U3.2@4952.76,6371.06
SRAM0_A2: U1.A14 U3.3 | length 598.4
  Top Layer w5: U1.A14@4834.65,5834.65 4834.65,6187.01 4984.25,6336.61 U3.3@4984.25,6366.14 U3.3@4984.25,6371.06
SRAM0_A3: U1.B14 U3.4 | length 650.8
  Top Layer w5: U1.B14@4834.65,5795.28 4854.33,5814.96 4854.33,6175.2 5015.75,6336.61 5015.75,6366.14 U3.4@5015.75,6371.06
SRAM0_A4: U1.A15 U3.5 | length 608.2
  Top Layer w5: U1.A15@4874.02,5834.65 4874.02,6163.39 5047.25,6336.61 U3.5@5047.25,6366.14 U3.5@5047.25,6371.06
SRAM0_A5: U1.B7 U3.18 | length 1535.5
  Top Layer w5: U1.B7@4559.06,5795.28 4578.74,5814.96 4578.74,6164.78 4680.24,6266.28 4680.24,6336.89 4874.85,6531.5 5330.71,6531.5 5456.69,6405.51 U3.18@5456.69,6371.06
SRAM0_A6: U1.A7 U3.19 | length 1545.7
  Top Layer w5: U1.A7@4559.06,5834.65 4559.06,6159.24 4670.24,6270.42 4670.24,6341.03 4872.52,6543.31 5350.4,6543.31 5488.19,6405.51 U3.19@5488.19,6371.06
SRAM0_A7: U1.B6 U3.20 | length 1650.9
  Top Layer w5: U1.B6@4519.69,5795.28 4539.37,5814.96 4539.37,6153.7 4660.24,6274.57 4660.24,6345.17 4870.18,6555.12 5370.08,6555.12 5519.69,6405.51 U3.20@5519.69,6371.06
SRAM0_A8: U1.B5 U3.21 | length 1716.8
  Top Layer w5: U1.B5@4480.32,5795.28 4500,5814.96 4500,6128.47 4650.24,6278.71 4650.24,6349.31 4867.85,6566.93 5389.77,6566.93 5551.18,6405.51 U3.21@5551.18,6371.06
SRAM0_A9: U1.A5 U3.22 | length 1727
  Top Layer w5: U1.A5@4480.32,5834.65 4480.32,6122.93 4640.24,6282.85 4640.24,6353.46 4865.52,6578.74 5409.45,6578.74 5582.68,6405.51 U3.22@5582.68,6371.06
SRAM0_A10: U1.B4 U3.23 | length 1800.8
  Top Layer w5: U1.B4@4440.95,5795.28 4460.63,5814.96 4460.63,6117.39 4630.24,6286.99 4630.24,6357.6 4861.38,6588.74 5395.83,6588.74 5582.68,6775.59 U3.23@5582.68,6810.04
SRAM0_A11: U1.A4 U3.24 | length 1738.2
  Top Layer w5: U1.A4@4440.95,5834.65 4440.95,6111.84 4620.24,6291.13 4620.24,6361.74 4860.15,6601.65 5377.25,6601.65 5551.18,6775.59 U3.24@5551.18,6810.04
SRAM0_A12: U1.A3 U3.25 | length 1731.3
  Top Layer w5: U1.A3@4401.58,5834.65 4401.58,6086.61 4610.24,6295.28 4610.24,6365.88 4856.01,6611.65 5355.75,6611.65 5519.69,6775.59 U3.25@5519.69,6810.04
SRAM0_A13: U1.C2 U3.26 | length 1868.2
  Top Layer w5: U1.C2@4362.21,5755.91 4342.52,5775.59 4314.96,5775.59 4303.15,5787.4 4303.15,6072.94 4851.87,6621.65 5334.25,6621.65 5488.19,6775.59 U3.26@5488.19,6810.04
SRAM0_A14: U1.C1 U3.27 | length 1824.6
  Top Layer w5: U1.C1@4322.84,5755.91 4318.9,5755.91 4291.34,5783.47 4291.34,6075.27 4847.72,6631.65 5278.05,6631.65 5386.55,6740.16 5421.26,6740.16 5456.69,6775.59 U3.27@5456.69,6810.04
SRAM0_A15: U1.K1 U3.42 | length 1860.3
  Top Layer w5: U1.K1@4322.84,5480.32 4307.81,5480.32 4148.51,5639.62 4148.51,6116.28 4793.88,6761.65 4970.32,6761.65 4984.25,6775.59 U3.42@4984.25,6810.04
SRAM0_A16: U1.L2 U3.43 | length 1900.1
  Top Layer w5: U1.L2@4362.21,5440.95 4342.52,5460.63 4313.36,5460.63 4138.51,5635.48 4138.51,6120.43 4789.73,6771.65 4933.07,6771.65 4952.76,6791.34 U3.43@4952.76,6810.04
SRAM0_A17: U1.L1 U3.44 | length 1839.2
  Top Layer w5: U1.L1@4318.9,5440.95 4128.51,5631.34 4128.51,6124.57 4813.98,6810.04 U3.44@4921.26,6810.04
SRAM0_A18: U1.D2 U3.28 | length 1883.8
  Top Layer w5: U1.D2@4362.21,5716.54 4342.52,5736.22 4309.69,5736.22 4279.53,5766.38 4279.53,6077.6 4289.87,6087.94 4843.58,6641.65 5273.91,6641.65 5383.29,6751.03 5400.64,6751.03 5425.2,6775.59 U3.28@5425.2,6810.04
SRAM0_D0: U1.A12 U3.7 | length 905.5
  Top Layer w5: U1.A12@4755.91,5834.65 4755.91,5862.21 4770.24,5876.54 4770.24,6299.61 4895.83,6425.2 5090.55,6425.2 5110.24,6405.51 U3.7@5110.24,6371.06
SRAM0_D1: U1.B11 U3.8 | length 1010.8
  Top Layer w5: U1.B11@4716.54,5795.28 4736.22,5814.96 4736.22,5870.08 4760.24,5894.09 4760.24,6303.75 4893.5,6437.01 5110.24,6437.01 5141.73,6405.51 U3.8@5141.73,6371.06
SRAM0_D2: U1.A11 U3.9 | length 1021
  Top Layer w5: U1.A11@4716.54,5834.65 4716.54,6200.79 4750.24,6234.49 4750.24,6307.89 4891.17,6448.82 5129.92,6448.82 5173.23,6405.51 U3.9@5173.23,6371.06
SRAM0_D3: U1.B10 U3.10 | length 1126.2
  Top Layer w5: U1.B10@4677.17,5795.28 4696.85,5814.96 4696.85,5866.14 4704.73,5874.02 4704.73,6204.72 4740.24,6240.24 4740.24,6312.03 4888.83,6460.63 5149.61,6460.63 5204.73,6405.51 U3.10@5204.73,6371.06
SRAM0_D4: U1.A10 U3.13 | length 1212.4
  Top Layer w5: U1.A10@4677.17,5834.65 4677.17,5866.14 4661.42,5881.89 4661.42,6176.75 4730.24,6245.57 4730.24,6316.18 4886.5,6472.44 5232.28,6472.44 5299.21,6405.51 U3.13@5299.21,6371.06
SRAM0_D5: U1.B9 U3.14 | length 1311.2
  Top Layer w5: U1.B9@4637.8,5795.28 4657.48,5814.96 4657.48,5854.33 4649.61,5862.21 4649.61,6179.08 4720.24,6249.71 4720.24,6320.32 4884.17,6484.25 5251.97,6484.25 5330.71,6405.51 U3.14@5330.71,6371.06
SRAM0_D6: U1.A9 U3.15 | length 1314.8
  Top Layer w5: U1.A9@4637.8,5834.65 4637.8,6181.41 4710.24,6253.85 4710.24,6324.46 4881.84,6496.06 5271.65,6496.06 5362.21,6405.51 U3.15@5362.21,6371.06
SRAM0_D7: U1.B8 U3.16 | length 1420.1
  Top Layer w5: U1.B8@4598.43,5795.28 4618.11,5814.96 4618.11,6175.87 4700.24,6258 4700.24,6328.6 4879.51,6507.87 5291.34,6507.87 5393.7,6405.51 U3.16@5393.7,6371.06
SRAM0_D8: U1.D1 U3.29 | length 1843.6
  Top Layer w5: U1.D1@4322.84,5716.54 4307.77,5716.54 4267.72,5756.59 4267.72,6079.93 4839.44,6651.65 5269.77,6651.65 5393.7,6775.59 U3.29@5393.7,6810.04
SRAM0_D9: U1.E2 U3.30 | length 1894.2
  Top Layer w5: U1.E2@4362.21,5677.17 4342.52,5696.85 4313.31,5696.85 4255.91,5754.25 4255.91,6082.26 4835.3,6661.65 5248.27,6661.65 5362.21,6775.59 U3.30@5362.21,6810.04
SRAM0_D10: U1.E1 U3.31 | length 1854.2
  Top Layer w5: U1.E1@4322.84,5677.17 4311.02,5677.17 4244.1,5744.1 4244.1,6084.59 4831.16,6671.65 5226.77,6671.65 5330.71,6775.59 U3.31@5330.71,6810.04
SRAM0_D11: U1.F2 U3.32 | length 1936.5
  Top Layer w5: U1.F2@4362.21,5637.8 4342.52,5657.48 4311.03,5657.48 4299.21,5669.29 4255.91,5669.29 4228.51,5696.69 4228.51,6083.15 4827.01,6681.65 5205.28,6681.65 5299.21,6775.59 U3.32@5299.21,6810.04
SRAM0_D12: U1.G2 U3.35 | length 1886.4
  Top Layer w5: U1.G2@4362.21,5598.43 4342.52,5618.11 4287.4,5618.11 4218.51,5687.01 4218.51,6087.29 4822.87,6691.65 5120.79,6691.65 5204.73,6775.59 U3.35@5204.73,6810.04
SRAM0_D13: U1.G1 U3.36 | length 1843.7
  Top Layer w5: U1.G1@4322.84,5598.43 4287.4,5598.43 4208.51,5677.32 4208.51,6091.43 4818.73,6701.65 5099.29,6701.65 5173.23,6775.59 U3.36@5173.23,6810.04
SRAM0_D14: U1.H2 U3.37 | length 1898.3
  Top Layer w5: U1.H2@4362.21,5559.06 4342.52,5578.74 4283.47,5578.74 4198.51,5663.7 4198.51,6095.57 4814.59,6711.65 5077.8,6711.65 5141.73,6775.59 U3.37@5141.73,6810.04
SRAM0_D15: U1.H1 U3.38 | length 1854.2
  Top Layer w5: U1.H1@4322.84,5559.06 4285.64,5559.06 4188.51,5656.19 4188.51,6099.72 4810.45,6721.65 5056.3,6721.65 5110.24,6775.59 U3.38@5110.24,6810.04
SRAM0_E: U1.B12 U3.6 | length 895.3
  Top Layer w5: U1.B12@4755.91,5795.28 4775.59,5814.96 4775.59,5854.33 4780.24,5858.98 4780.24,6295.46 4898.16,6413.39 5070.87,6413.39 5078.74,6405.51 U3.6@5078.74,6371.06
SRAM0_LB: U1.J2 U3.39 | length 1903.3
  Top Layer w5: U1.J2@4362.21,5519.69 4342.52,5539.37 4291.18,5539.37 4178.51,5652.05 4178.51,6103.86 4806.3,6731.65 5034.8,6731.65 5078.74,6775.59 U3.39@5078.74,6810.04
SRAM0_OE: U1.K2 U3.41 | length 1906.3
  Top Layer w5: U1.K2@4362.21,5480.32 4342.52,5500 4302.27,5500 4158.51,5643.76 4158.51,6112.14 4798.02,6751.65 4991.81,6751.65 5015.75,6775.59 U3.41@5015.75,6810.04
SRAM0_UB: U1.J1 U3.40 | length 1857.2
  Top Layer w5: U1.J1@4322.84,5519.69 4296.73,5519.69 4168.51,5647.91 4168.51,6108 4802.16,6741.65 5013.31,6741.65 5047.25,6775.59 U3.40@5047.25,6810.04
SRAM0_W: U1.A8 U3.17 | length 1430.3
  Top Layer w5: U1.A8@4598.43,5834.65 4598.43,6170.33 4690.24,6262.14 4690.24,6332.74 4877.18,6519.69 5311.03,6519.69 5425.2,6405.51 U3.17@5425.2,6371.06
SRAM1_A0: U1.Y12 U4.1 | length 962.6
  Top Layer w5: U1.Y12@4755.91,5086.61 v1(4775.59,5066.93) ; v1(4893.7,4208.66) U4.1@4921.26,4208.66
  MidLayer3 w5: v1(4775.59,5066.93) 4775.59,5007.87 4893.7,4889.76 v1(4893.7,4208.66)
SRAM1_A1: R19.2 U1.W12 U4.2 | length 1050
  Top Layer w5: U1.W12@4755.91,5125.98 v1(4775.59,5106.3) ; R19.2@4952.76,4157.48 U4.2@4952.76,4216.54 4952.76,4221.46 v1(4952.76,4267.72)
  MidLayer3 w5: v1(4775.59,5106.3) 4795.28,5086.61 4795.28,5007.87 4913.39,4889.76 4913.39,4307.09 v1(4952.76,4267.72)
SRAM1_A2: U1.N1 U4.3 | length 1656.7
  Top Layer w5: U1.N1@4322.84,5362.21 4317.29,5362.21 4149.61,5194.52 4149.61,4935.87 4794.14,4291.34 4956.69,4291.34 4984.25,4263.78 U4.3@4984.25,4221.46
SRAM1_A3: U1.N2 U4.4 | length 1714.1
  Top Layer w5: U1.N2@4362.21,5362.21 4342.52,5342.52 4314.96,5342.52 4160.34,5187.89 4160.34,4939.28 4783.79,4315.83 4987.32,4315.83 5015.75,4287.4 U4.4@5015.75,4221.46
SRAM1_A4: U1.P1 U4.5 | length 1651.9
  Top Layer w5: U1.P1@4322.84,5322.84 4314.96,5322.84 4170.47,5178.34 4170.47,4943.29 4746.67,4367.09 4787.93,4325.83 4992.13,4325.83 5047.25,4270.71 U4.5@5047.25,4221.46
SRAM1_A5: U1.Y1 U4.18 | length 1622.9
  Top Layer w5: U1.Y1@4322.84,5086.61 4318.9,5086.61 4291.34,5059.06 4291.34,4977.98 4487.54,4781.79 4824.44,4444.88 5250.36,4444.88 5415.72,4279.53 5433.07,4279.53 5456.69,4255.91 U4.18@5456.69,4221.46
SRAM1_A6: U1.Y2 U4.19 | length 1671.1
  Top Layer w5: U1.Y2@4362.21,5086.61 4342.52,5066.93 4314.96,5066.93 4303.15,5055.12 4303.15,4980.32 4826.77,4456.69 5295.28,4456.69 5488.19,4263.78 U4.19@5488.19,4221.46
SRAM1_A7: U1.AA3 U4.20 | length 1567
  Top Layer w5: U1.AA3@4401.58,5047.24 4421.26,5027.56 4421.26,4877.95 4515.75,4783.47 4570.87,4783.47 4885.83,4468.5 5299.21,4468.5 5488.19,4279.53 5494.46,4279.53 5519.69,4254.3 U4.20@5519.69,4221.46
SRAM1_A8: U1.AB4 U4.21 | length 1543.8
  Top Layer w5: U1.AB4@4440.95,5007.87 4440.95,4874.02 4519.69,4795.28 4573.2,4795.28 4888.16,4480.32 5342.52,4480.32 5551.18,4271.65 U4.21@5551.18,4221.46
SRAM1_A9: U1.AA4 U4.22 | length 1595.3
  Top Layer w5: U1.AA4@4440.95,5047.24 4460.63,5027.56 4460.63,4870.08 4519.69,4811.02 4571.59,4811.02 4890.49,4492.13 5344.85,4492.13 5582.68,4254.3 U4.22@5582.68,4221.46
SRAM1_A10: U1.AB5 U4.23 | length 1479.1
  Top Layer w5: U1.AB5@4480.32,5007.87 4480.32,4866.14 4519.69,4826.77 4569.99,4826.77 4892.82,4503.94 5460.63,4503.94 5582.68,4625.98 U4.23@5582.68,4660.43
SRAM1_A11: U1.AA5 U4.24 | length 1467.2
  Top Layer w5: U1.AA5@4480.32,5047.24 4500,5027.56 4500,4866.14 4523.62,4842.52 4568.38,4842.52 4896.96,4513.94 5439.14,4513.94 5551.18,4625.98 U4.24@5551.18,4660.43
SRAM1_A12: U1.AA6 U4.25 | length 1376.6
  Top Layer w5: U1.AA6@4519.69,5047.24 4539.37,5027.56 4539.37,4885.67 4901.11,4523.94 5417.64,4523.94 5519.69,4625.98 U4.25@5519.69,4660.43
SRAM1_A13: U1.AB7 U4.26 | length 1272.9
  Top Layer w5: U1.AB7@4559.06,5007.87 4559.06,4880.13 4905.25,4533.94 5396.14,4533.94 5488.19,4625.98 U4.26@5488.19,4660.43
SRAM1_A14: U1.AA7 U4.27 | length 1264.2
  Top Layer w5: U1.AA7@4559.06,5047.24 4578.74,5027.56 4578.74,4874.59 4909.39,4543.94 5374.65,4543.94 5456.69,4625.98 U4.27@5456.69,4660.43
SRAM1_A15: U1.AA12 U4.42 | length 498.5
  Top Layer w5: U1.AA12@4755.91,5047.24 4775.59,5027.56 4775.59,4931.1 4848.58,4858.11 4848.58,4799.42 4947.21,4700.79 4976.38,4700.79 4984.25,4692.91 U4.42@4984.25,4665.35 U4.42@4984.25,4660.43
SRAM1_A16: U1.AB11 U4.43 | length 445.3
  Top Layer w5: U1.AB11@4716.54,5007.87 4716.54,4958.66 4838.58,4836.61 4838.58,4795.28 4952.76,4681.1 U4.43@4952.76,4665.35 U4.43@4952.76,4660.43
SRAM1_A17: U1.AA10 U4.44 | length 513.4
  Top Layer w5: U1.AA10@4677.17,5047.24 4696.85,5027.56 4696.85,4841.33 4877.75,4660.43 U4.44@4921.26,4660.43
SRAM1_A18: U1.AB8 U4.28 | length 1160.4
  Top Layer w5: U1.AB8@4598.43,5007.87 4598.43,4869.04 4913.53,4553.94 5353.15,4553.94 5425.2,4625.98 U4.28@5425.2,4660.43
SRAM1_D0: U1.R1 U4.7 | length 1636.8
  Top Layer w5: U1.R1@4322.84,5283.47 4309.26,5283.47 4190.73,5164.93 4190.73,4951.31 4796.22,4345.83 5020.32,4345.83 5110.24,4255.91 U4.7@5110.24,4221.46
SRAM1_D1: U1.R2 U4.8 | length 1682.5
  Top Layer w5: U1.R2@4362.21,5283.47 4342.52,5263.78 4303.72,5263.78 4201.14,5161.2 4201.14,4955.05 4775.4,4380.78 4800.36,4355.83 5041.81,4355.83 5141.73,4255.91 U4.8@5141.73,4221.46
SRAM1_D2: U1.T1 U4.9 | length 1633.1
  Top Layer w5: U1.T1@4322.84,5244.09 4298.18,5244.09 4211.55,5157.47 4211.55,4958.78 4804.5,4365.83 5063.31,4365.83 5173.23,4255.91 U4.9@5173.23,4221.46
SRAM1_D3: U1.T2 U4.10 | length 1678.6
  Top Layer w5: U1.T2@4362.21,5244.09 4342.52,5224.41 4292.64,5224.41 4222.24,5154.01 4222.24,4962.23 4808.64,4375.83 5084.8,4375.83 5204.73,4255.91 U4.10@5204.73,4221.46
SRAM1_D4: U1.U2 U4.13 | length 1703.1
  Top Layer w5: U1.U2@4362.21,5204.72 4342.52,5185.04 4316.54,5185.04 4275.59,5144.1 4275.59,5137.8 4232.28,5094.49 4232.28,4966.33 4812.79,4385.83 5169.29,4385.83 5299.21,4255.91 U4.13@5299.21,4221.46
SRAM1_D5: U1.V1 U4.14 | length 1647.9
  Top Layer w5: U1.V1@4322.84,5165.35 4318.9,5165.35 4244.1,5090.55 4244.1,4968.66 4815.12,4397.64 5188.98,4397.64 5330.71,4255.91 U4.14@5330.71,4221.46
SRAM1_D6: U1.V2 U4.15 | length 1691.5
  Top Layer w5: U1.V2@4362.21,5165.35 4342.52,5145.67 4314.96,5145.67 4255.91,5086.61 4255.91,4970.99 4817.45,4409.45 5208.66,4409.45 5362.21,4255.91 U4.15@5362.21,4221.46
SRAM1_D7: U1.W1 U4.16 | length 1635.4
  Top Layer w5: U1.W1@4322.84,5125.98 4318.9,5125.98 4267.72,5074.8 4267.72,4973.32 4819.78,4421.26 5228.35,4421.26 5393.7,4255.91 U4.16@5393.7,4221.46
SRAM1_D8: U1.AA8 U4.29 | length 1151.7
  Top Layer w5: U1.AA8@4598.43,5047.24 4618.11,5027.56 4618.11,4863.5 4917.68,4563.94 5331.65,4563.94 5393.7,4625.98 U4.29@5393.7,4660.43
SRAM1_D9: U1.AB9 U4.30 | length 1047.3
  Top Layer w5: U1.AB9@4637.8,5007.87 4637.8,4857.96 4920.95,4574.8 5311.03,4574.8 5362.21,4625.98 U4.30@5362.21,4660.43
SRAM1_D10: U1.AA9 U4.31 | length 1038.6
  Top Layer w5: U1.AA9@4637.8,5047.24 4657.48,5027.56 4657.48,4852.42 4925.09,4584.8 5289.53,4584.8 5330.71,4625.98 U4.31@5330.71,4660.43
SRAM1_D11: U1.AB10 U4.32 | length 934.8
  Top Layer w5: U1.AB10@4677.17,5007.87 4677.17,4846.87 4929.24,4594.8 5268.03,4594.8 5299.21,4625.98 U4.32@5299.21,4660.43
SRAM1_D12: U1.AA16 U4.35 | length 596.3
  Top Layer w5: U1.AA16@4913.39,5047.24 4933.07,5027.56 4933.07,4814.96 4964.57,4783.47 5116.14,4783.47 5204.73,4694.88 U4.35@5204.73,4665.35 U4.35@5204.73,4660.43
SRAM1_D13: U1.AB16 U4.36 | length 540.1
  Top Layer w5: U1.AB16@4913.39,5007.87 4913.39,4819.47 4961.2,4771.65 5106.3,4771.65 5173.23,4704.72 U4.36@5173.23,4665.35 U4.36@5173.23,4660.43
SRAM1_D14: U1.AA15 U4.37 | length 567.9
  Top Layer w5: U1.AA15@4874.02,5047.24 4893.7,5027.56 4893.7,4976.38 4898.58,4971.5 4898.58,4820.13 4958.87,4759.84 5078.74,4759.84 5141.73,4696.85 U4.37@5141.73,4665.35 U4.37@5141.73,4660.43
SRAM1_D15: U1.AB15 U4.38 | length 504.2
  Top Layer w5: U1.AB15@4874.02,5007.87 4874.02,4972.44 4888.58,4957.87 4888.58,4815.99 4956.54,4748.03 5057.09,4748.03 5110.24,4694.88 U4.38@5110.24,4665.35 U4.38@5110.24,4660.43
SRAM1_E: U1.P2 U4.6 | length 1688.2
  Top Layer w5: U1.P2@4362.21,5322.84 4342.52,5303.15 4311.03,5303.15 4180.6,5172.72 4180.6,4947.3 4761.45,4366.45 4792.08,4335.83 4998.82,4335.83 5078.74,4255.91 U4.6@5078.74,4221.46
SRAM1_LB: U1.AB14 U4.39 | length 500.7
  Top Layer w5: U1.AB14@4834.65,5007.87 4834.65,4968.5 4878.58,4924.57 4878.58,4811.85 4954.21,4736.22 5043.31,4736.22 5078.74,4700.79 U4.39@5078.74,4665.35 U4.39@5078.74,4660.43
SRAM1_OE: U1.AB13 U4.41 | length 468.3
  Top Layer w5: U1.AB13@4795.28,5007.87 4795.28,4992.13 4814.65,4972.76 4814.65,4921.58 4858.58,4877.64 4858.58,4803.56 4949.55,4712.6 5000,4712.6 5015.75,4696.85 5015.75,4665.35 U4.41@5015.75,4660.43
SRAM1_UB: U1.AA13 U4.40 | length 530.9
  Top Layer w5: U1.AA13@4795.28,5047.24 4814.96,5027.56 4814.96,5000 4824.65,4990.32 4824.65,4943.07 4868.58,4899.13 4868.58,4807.7 4951.88,4724.41 5019.69,4724.41 5047.25,4696.85 U4.40@5047.25,4665.35 U4.40@5047.25,4660.43
SRAM1_W: U1.W2 U4.17 | length 1679
  Top Layer w5: U1.W2@4362.21,5125.98 4342.52,5106.3 4314.96,5106.3 4279.53,5070.87 4279.53,4975.65 4822.11,4433.07 5248.03,4433.07 5425.2,4255.91 U4.17@5425.2,4221.46
SSPCLK: U1.B17 U5.165 | length 1352
  Top Layer w5: U1.B17@4952.76,5795.28 4972.44,5814.96 4972.44,5854.33 5046.06,5927.95 5305.91,5927.95 5716.54,6338.58 5948.82,6338.58 6000,6287.4 U5.165@6000,6251.97
SSPEN: U1.A18 U5.166 | length 1261.5
  Top Layer w5: U1.A18@4992.13,5834.65 4992.13,5858.27 5051.81,5917.95 5311.66,5917.95 5720.47,6326.77 5944.88,6326.77 5984.25,6287.4 U5.166@5984.25,6251.97
SSPFRM: U1.B16 U5.164 | length 1440
  Top Layer w5: U1.B16@4913.39,5795.28 4933.07,5814.96 4933.07,5893.7 4977.32,5937.95 5300.16,5937.95 5712.6,6350.39 5952.76,6350.39 6015.75,6287.4 U5.164@6015.75,6251.97
SSPRX_UART2RX: U1.A19 U5.169 | length 1160
  Top Layer w5: U1.A19@5031.5,5834.65 5031.5,5866.14 5063.31,5897.95 5323.15,5897.95 5728.35,6303.15 5921.26,6303.15 5937.01,6287.4 U5.169@5937.01,6251.97
SSPTX_UART2TX: U1.B18 U5.167 | length 1266.2
  Top Layer w5: U1.B18@4992.13,5795.28 5011.81,5814.96 5011.81,5862.21 5057.56,5907.95 5317.4,5907.95 5724.41,6314.96 5940.95,6314.96 5968.51,6287.4 U5.167@5968.51,6251.97
SW0: HDR2.44 U1.W19 | length 605.4
  Top Layer w5: U1.W19@5031.5,5125.98 v1(5051.18,5145.67)
  Bottom Layer w5: v1(5051.18,5145.67) 5051.18,5114.17 5080.87,5084.49 5080.87,4927.01 5236.22,4771.65 5236.22,4728.35 5248.03,4716.54 HDR2.44@5248.03,4649.61
SW1: HDR2.46 U1.Y20 | length 581.9
  Top Layer w5: U1.Y20@5070.87,5086.61 v1(5090.55,5106.3)
  Bottom Layer w5: v1@5090.87,5105.98 5090.87,4983.94 5303.15,4771.65 5303.15,4716.54 5279.53,4692.91 HDR2.46@5279.53,4649.61
SW2: HDR2.48 U1.W20 | length 618.5
  Top Layer w5: U1.W20@5070.87,5125.98 v1(5090.55,5145.67)
  Bottom Layer w5: v1(5090.55,5145.67) 5110.24,5125.98 5110.24,4980.32 5314.96,4775.59 5314.96,4696.85 5311.03,4692.91 HDR2.48@5311.03,4649.61
SW3: HDR2.50 U1.V20 | length 667.6
  Top Layer w5: U1.V20@5074.8,5169.29 v1(5090.55,5185.04) v1@5094.49,5188.98
  Bottom Layer w5: v1(5090.55,5185.04) 5120.24,5155.35 5120.24,5076.61 5149.61,5047.24 5149.61,4956.69 5324.96,4781.34 5324.96,4718.35 5342.52,4700.79 HDR2.50@5342.52,4649.61
SW4: HDR2.52 U1.U19 | length 752.7
  Top Layer w5: U1.U19@5031.5,5204.72 v1(5051.18,5224.41)
  Bottom Layer w5: v1(5051.18,5224.41) 5070.87,5204.72 5098.74,5204.72 5130.24,5173.23 5130.24,5121.73 5196.85,5055.12 5196.85,4929.13 5334.96,4791.02 5334.96,4731.97 5374.02,4692.91 HDR2.52@5374.02,4649.61
SW5: HDR2.54 U1.U20 | length 741.5
  Top Layer w5: U1.U20@5070.87,5204.72 v1(5090.55,5224.41)
  Bottom Layer w5: v1(5090.55,5224.41) 5096.93,5224.41 5140.24,5181.1 5140.24,5127.48 5206.85,5060.87 5206.85,4934.88 5344.96,4796.77 5344.96,4745.59 5377.95,4712.6 5385.83,4712.6 5405.51,4692.91 HDR2.54@5405.51,4649.61
SW6: HDR2.56 U1.T19 | length 829.5
  Top Layer w5: U1.T19@5031.5,5244.09 v1(5051.18,5263.78)
  Bottom Layer w5: v1(5051.18,5263.78) 5070.87,5244.1 5098.43,5244.1 5110.24,5232.28 5110.24,5225.25 5150.24,5185.25 5150.24,5133.23 5216.85,5066.61 5216.85,4940.63 5354.96,4802.52 5354.96,4755.28 5385.83,4724.41 5405.51,4724.41 5437.01,4692.91 HDR2.56@5437.01,4649.61
SW7: HDR2.58 U1.T20 | length 810.1
  Top Layer w5: U1.T20@5070.87,5244.09 v1(5090.55,5263.78)
  Bottom Layer w5: v1(5090.55,5263.78) 5110.24,5263.78 5129.92,5244.09 5129.92,5224.41 5160.24,5194.1 5160.24,5138.98 5226.85,5072.36 5226.85,4946.38 5468.51,4704.72 HDR2.58@5468.51,4649.61
SWC0: HDR2.18 U1.V12 | length 571.1
  Top Layer w5: U1.V12@4755.91,5165.35 v1(4775.59,5145.67)
  Bottom Layer w5: v1(4775.59,5145.67) 4795.28,5125.98 4795.28,5000 4864.02,4931.26 4864.02,4718.35 4838.58,4692.91 HDR2.18@4838.58,4649.61
SWC1: HDR2.16 U1.W11 | length 574.8
  Top Layer w5: U1.W11@4716.54,5125.98 v1(4736.22,5106.3)
  Bottom Layer w5: v1(4736.22,5106.3) 4755.91,5086.61 4755.91,5023.62 4854.02,4925.51 4854.02,4731.97 4811.02,4688.98 4811.02,4649.61 HDR2.16@4811.02,4625.98
SWC2: HDR2.14 U1.Y11 | length 474.5
  Top Layer w5: U1.Y11@4716.54,5086.61 v1(4736.22,5066.93)
  Bottom Layer w5: v1(4736.22,5066.93) 4736.22,5007.87 4720.47,4992.13 4720.47,4732.28 4775.59,4677.17 HDR2.14@4775.59,4649.61